# EAGLE board 3K_valdiklis_v1.2x (EAGLE 6.4)
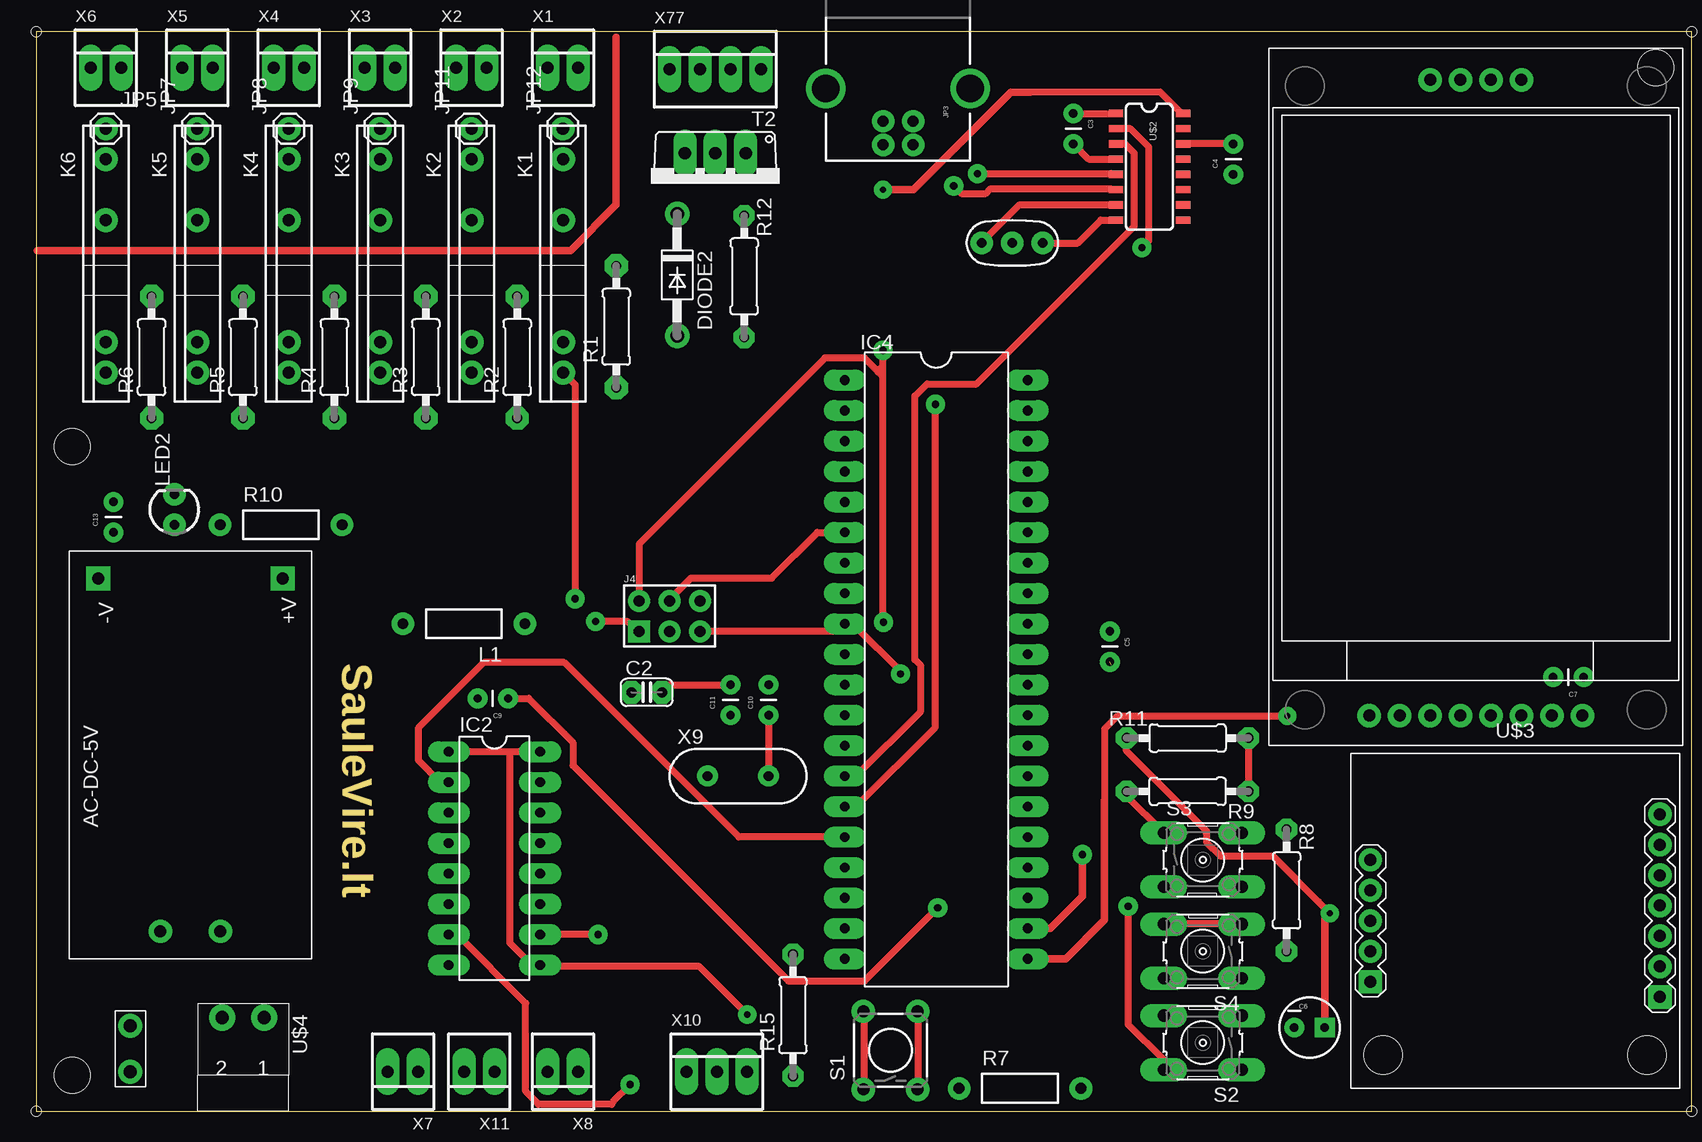
[diagram p0: board, top side]
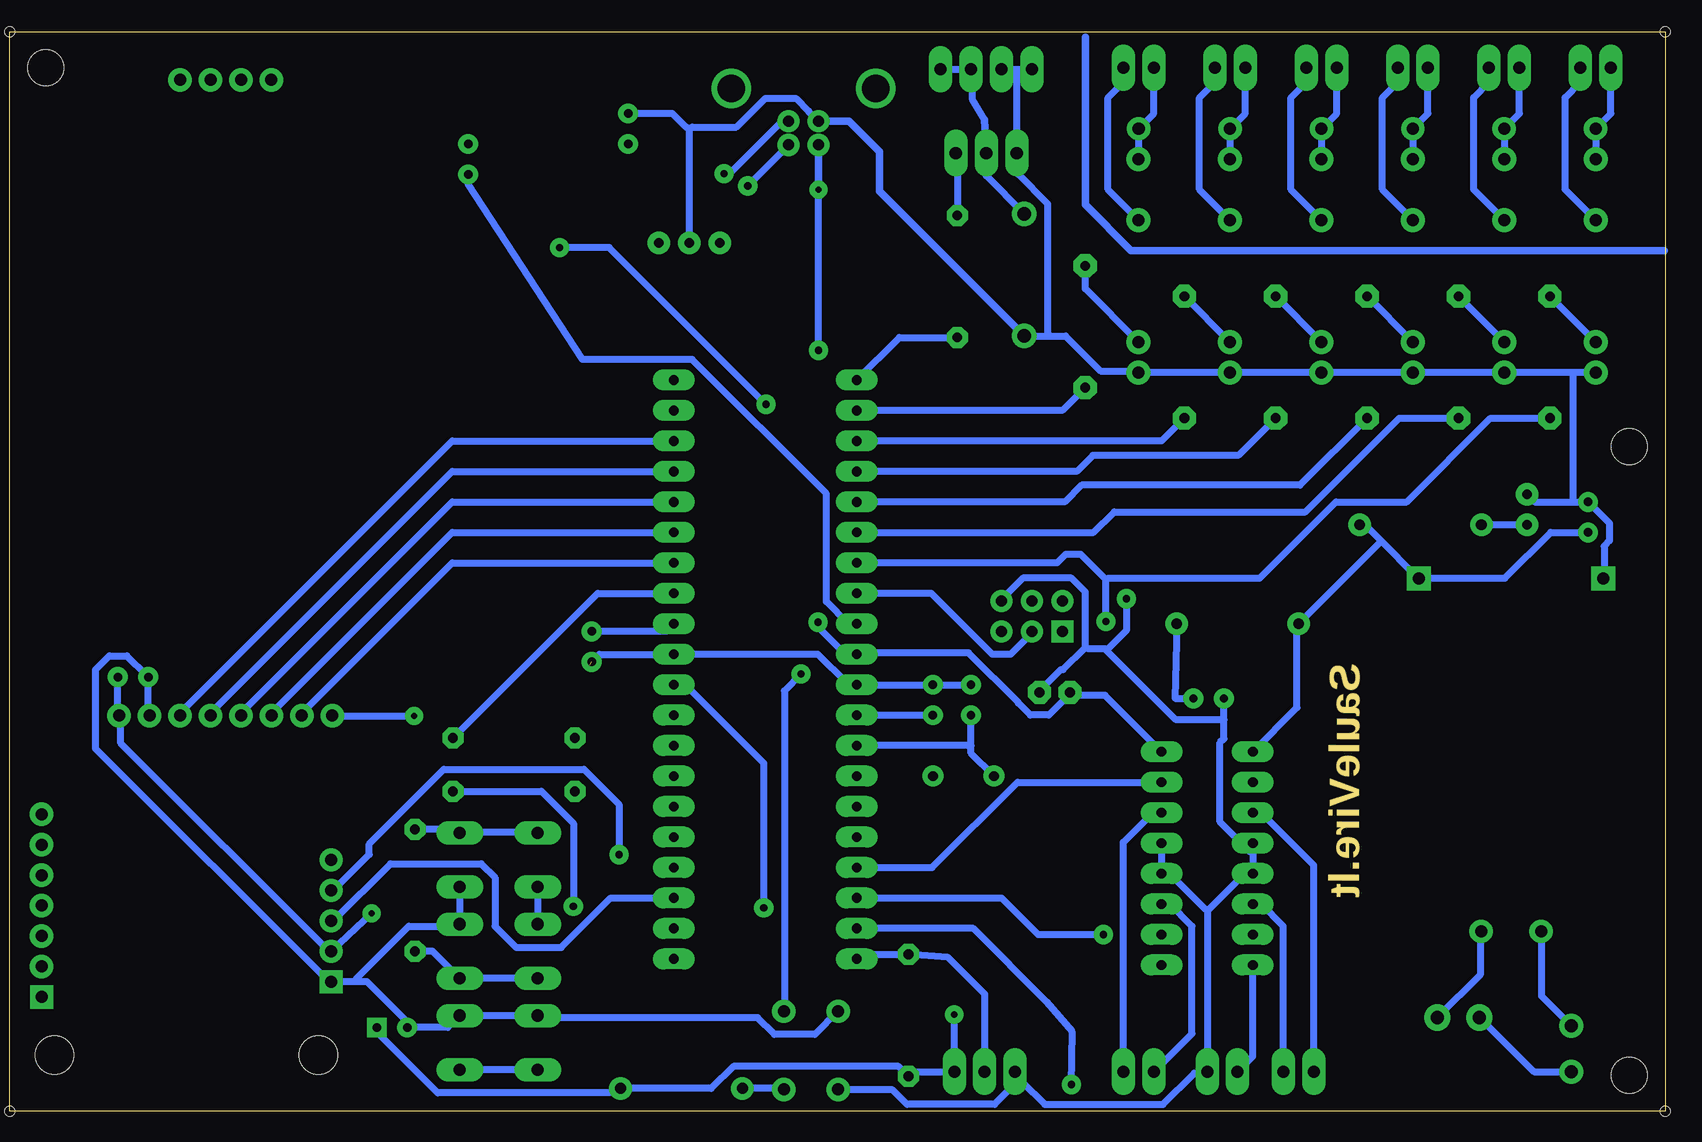
[diagram p1: board, bottom side, seen from below]

No outline drawn. Coordinates in mm, seen from the top.
Copper layers (1*16): Top 0.035mm / dielectric 1.5mm / Bottom 0.035mm
Design rules "3K_valdiklis_v1 *": minimum track width 0.6mm, minimum drill 0.6mm, track to track 0.6mm, track to pad 0.6mm, pad to pad 0.6mm, via to via 0.6mm, smd to smd 0.6mm, copper to edge 0.6mm, drill to drill 0.6mm, minimum pad ring 0.47mm, minimum via ring 0.5mm, stop-mask expansion 0.6mm, vias tented up to drill 0.6mm, thermal gap 0.6mm
Net classes: 1 vcc: width 0.5 mm; 4 gnd: width 0.5 mm; 5 220v: width 0.5 mm
Holes 3 mm at 8,55.42 140,87 8,3
Holes 0.8 mm at 5,0 5,90 143,90 143,0
Milling: 4 lines

## Footprints (pad centres in the part's own frame; a part is rotated, then mirrored left to right if it is on the bottom)
HLK-PM01_AC_DC = drill 1 pad 2 square: +V 31.7,2.4; -V 31.7,17.8 | drill 1: AC0 2.3,12.6; AC1 2.3,7.6
C025-024X044 = drill 0.813 pad 1.93 octagon: 1 -1.27,0; 2 1.27,0
CAP-PTH-SMALL = drill 0.7 pad 1.651: 1 0,0; 2 2.54,0
CPOL-RADIAL-10UF-25V = drill 0.7 pad 1.651 square: 1 1.27,0 | drill 0.7 pad 1.651: 2 -1.27,0
DO41-10 = drill 1.118: A 5.08,0; C -5.08,0
DIL16 = drill 0.813 long: 1 -8.89,-3.81; 2 -6.35,-3.81; 3 -3.81,-3.81; 4 -1.27,-3.81; 5 1.27,-3.81; 6 3.81,-3.81; 7 6.35,-3.81; 8 8.89,-3.81; 9 8.89,3.81; 10 6.35,3.81; 11 3.81,3.81; 12 1.27,3.81; 13 -1.27,3.81; 14 -3.81,3.81; 15 -6.35,3.81; 16 -8.89,3.81
DIL40 = drill 0.813 long: 1 -24.13,-7.62; 2 -21.59,-7.62; 3 -19.05,-7.62; 4 -16.51,-7.62; 5 -13.97,-7.62; 6 -11.43,-7.62; 7 -8.89,-7.62; 8 -6.35,-7.62; 9 -3.81,-7.62; 10 -1.27,-7.62; 11 1.27,-7.62; 12 3.81,-7.62; 13 6.35,-7.62; 14 8.89,-7.62; 15 11.43,-7.62; 16 13.97,-7.62; 17 16.51,-7.62; 18 19.05,-7.62; 19 21.59,-7.62; 20 24.13,-7.62; 21 24.13,7.62; 22 21.59,7.62; 23 19.05,7.62; 24 16.51,7.62; 25 13.97,7.62; 26 11.43,7.62; 27 8.89,7.62; 28 6.35,7.62; 29 3.81,7.62; 30 1.27,7.62; 31 -1.27,7.62; 32 -3.81,7.62; 33 -6.35,7.62; 34 -8.89,7.62; 35 -11.43,7.62; 36 -13.97,7.62; 37 -16.51,7.62; 38 -19.05,7.62; 39 -21.59,7.62; 40 -24.13,7.62
HEAD3X2 = drill 0.914 pad 1.778 square: 1 0,0 | drill 0.914 pad 1.778: 2 0,2.54; 3 2.54,0; 4 2.54,2.54; 5 5.08,0; 6 5.08,2.54
1X02_BIG = drill 1.067 pad 1.93: P$1 0,0; P$2 3.81,0
USB-B-PTH = drill 0.914 pad 1.676: D+ 0,1.25; D- 1.981,1.25; GND 0,-1.25; VBUS 1.981,-1.25 | drill 2.286: S1 -2.718,-6.02; S2 -2.718,6.02
1X01 = drill 1.016 pad 1.88: 1 0,0
S202T02 = drill 1 pad 2: A 10.16,0; DS1 -5.08,0; DS2 0,0; K 12.7,0
RES-AXIAL-0.4 = drill 0.9 pad 1.88: P$1 -5.08,0; P$2 5.08,0
LED3MM = drill 0.813 pad 1.88: A -1.27,0; K 1.27,0
0207/10 = drill 0.813 pad 1.93 octagon: 1 -5.08,0; 2 5.08,0
0207/10' = drill 0.813 octagon: 1 -5.08,0; 2 5.08,0
0207/10'' = drill 0.813 pad 1.676 octagon: 1 -5.08,0; 2 5.08,0
TACTILE-PTH = drill 1.016 pad 1.88: 1 -3.251,2.261; 2 3.251,2.261; 3 -3.251,-2.261; 4 3.251,-2.261
B3F-10XX = drill 1.016 long: 1 -3.251,2.261; 2 3.251,2.261; 3 -3.251,-2.261; 4 3.251,-2.261
TO220AV = drill 1.016 long: B -2.54,-2.54; C 0,-2.54; E 2.54,-2.54
1.8"_TFT = drill 1 pad 1.778: P$3 55.5,21.05; P$4 55.5,18.52; P$5 55.5,15.98; P$6 55.5,13.44; P$9 2.5,26.14; P$10 2.5,23.6; P$11 2.5,21.06; P$12 2.5,18.52; P$13 2.5,15.98; P$14 2.5,13.44; P$15 2.5,10.9; P$16 2.5,8.36
SO016 = smd 0.6 x 1.2: 1 -4.445,-2.8; 2 -3.175,-2.8; 3 -1.905,-2.8; 4 -0.635,-2.8; 5 0.635,-2.8; 6 1.905,-2.8; 7 3.175,-2.8; 8 4.445,-2.8; 9 4.445,2.8; 10 3.175,2.8; 11 1.905,2.8; 12 0.635,2.8; 13 -0.635,2.8; 14 -1.905,2.8; 15 -3.175,2.8; 16 -4.445,2.8
RTC_EEPROM_BATTERY = drill 1 square: J1.1 -12.065,-5.08; J2.1 12.065,-6.35 | drill 1: J1.2 -12.065,-2.54; J1.3 -12.065,0; J1.4 -12.065,2.54; J1.5 -12.065,5.08; J2.2 12.065,-3.81; J2.3 12.065,-1.27; J2.4 12.065,1.27; J2.5 12.065,3.81; J2.6 12.065,6.35; J2.7 12.065,8.89 | hole 3.2: -11,-11.176; 11,-11.176
2-3.50 = drill 1.1 pad 2.184: 1 2.05,1.2; 2 5.55,1.2
22-23-2021 = drill 1 long: 1 -1.27,0; 2 1.27,0
HC49US = drill 0.813: 1 -2.54,0; 2 2.54,0
22-23-2031 = drill 1 long: 1 -2.54,0; 2 0,0; 3 2.54,0
22-23-2041 = drill 1 long: 1 -3.81,0; 2 -1.27,0; 3 1.27,0; 4 3.81,0
RESONATOR-PTH = drill 0.8 pad 1.88: 1 -2.54,0; 2 0,0; 3 2.54,0

## Placement (x,y rotation side)
AC-DC-5V  HLK-PM01_AC_DC  [HLK-PM01_AC_DC]  27.94,12.7 90 top
C2  [C025-024X044]  55.88,34.92 0 top
C3  100n  [CAP-PTH-SMALL]  91.44,83.19 270 top
C4  100n  [CAP-PTH-SMALL]  104.78,78.11 90 top
C5  100n  [CAP-PTH-SMALL]  94.49,40.01 270 top
C6  4u7  [CPOL-RADIAL-10UF-25V]  111.12,6.99 0 top
C7  100n  [CAP-PTH-SMALL]  133.99,36.2 180 top
C9  100n  [CAP-PTH-SMALL]  44.32,34.42 180 top
C10  22p  [CAP-PTH-SMALL]  66.04,33.02 90 top
C11  22p  [CAP-PTH-SMALL]  62.87,33.02 90 top
C13  100n  [CAP-PTH-SMALL]  11.43,48.26 90 top
DIODE2  1N4004  [DO41-10]  58.42,69.72 270 top
IC2  L293D  [DIL16]  43.18,21.08 270 top
IC4  ATMEGA1284  [DIL40]  80.01,36.83 270 top
J4  HEAD3X2  [HEAD3X2]  55.24,40.01 0 top
JP2  M02PTH2  [1X02_BIG]  12.83,7.11 270 top
JP3  USB-B  [USB-B-PTH]  76.83,82.55 270 top
JP5  M01PTH  [1X01]  10.79,81.92 0 top
JP7  M01PTH  [1X01]  18.41,81.92 90 top
JP8  M01PTH  [1X01]  26.04,81.92 90 top
JP9  M01PTH  [1X01]  33.66,81.92 90 top
JP11  M01PTH  [1X01]  41.27,81.92 90 top
JP12  M01PTH  [1X01]  48.9,81.92 90 top
K1  S202T02  [S202T02]  48.9,74.3 270 top
K2  S202T02  [S202T02]  41.27,74.3 270 top
K3  S202T02  [S202T02]  33.66,74.3 270 top
K4  S202T02  [S202T02]  26.04,74.3 270 top
K5  S202T02  [S202T02]  18.41,74.3 270 top
K6  S202T02  [S202T02]  10.79,74.3 270 top
L1  10uH  [RES-AXIAL-0.4]  40.64,40.64 180 top
LED2  PWR  [LED3MM]  16.51,50.16 90 top
R1  330  [0207/10]  53.34,65.41 90 top
R2  330  [0207/10]  45.09,62.87 90 top
R3  330  [0207/10]  37.47,62.87 90 top
R4  330  [0207/10]  29.84,62.87 90 top
R5  330  [0207/10]  22.23,62.87 90 top
R6  330  [0207/10]  14.61,62.87 90 top
R7  10k  [RES-AXIAL-0.4]  87,1.91 0 top
R8  3k3  [0207/10']  109.22,18.41 90 top
R9  1k  [0207/10']  100.97,26.67 0 top
R10  1k  [RES-AXIAL-0.4]  25.4,48.9 0 top
R11  2k  [0207/10']  100.97,31.11 180 top
R12  2k  [0207/10']  64.01,69.6 90 top
R15  4.7K  [0207/10'']  68.07,8 90 top
S1  RESET  [TACTILE-PTH]  76.2,5.08 90 top
S2  [B3F-10XX]  102.23,5.71 180 top
S3  [B3F-10XX]  102.23,20.95 0 top
S4  [B3F-10XX]  102.23,13.34 180 top
T2  TIP120V  [TO220AV]  61.59,77.34 180 top
U$1  1.8"_TFT  [1.8"_TFT]  142.24,30.48 90 top
U$2  CH340G  [SO016]  97.79,78.74 270 top
U$3  RTC-EEPROM-BATTERY  [RTC_EEPROM_BATTERY]  128.27,15.88 0 top
U$4  2-3.50  [2-3.50]  26.04,9.02 180 top
X1  Boiler pump  [22-23-2021]  48.9,87 0 top
X2  Storage tank pump  [22-23-2021]  41.27,87 0 top
X3  Radiator pump  [22-23-2021]  33.66,87 0 top
X4  4 way valve 1  [22-23-2021]  26.04,87 0 top
X5  4 way valve 2  [22-23-2021]  18.41,87 0 top
X6  Floor heating  [22-23-2021]  10.79,87 0 top
X7  motorized valve 1  [22-23-2021]  35.56,3.3 180 top
X8  motorized valve 2  [22-23-2021]  48.9,3.3 180 top
X9  16MHz  [HC49US]  63.5,27.94 0 top
X10  22-23-2031  [22-23-2031]  61.72,3.3 0 top
X11  +12V  [22-23-2021]  41.91,3.3 180 top
X77  PUMP1  [22-23-2041]  61.59,86.87 0 top
Y1  12mhz  [RESONATOR-PTH]  86.36,72.39 0 top

## Library data of the parts
AC-DC-5V = HLK-PM01
C2 = rcl-1
C3-C7 C9 C13 LED2 S1 X9 = SparkFun
C10 C11 = SparkFun; OPTION: Do not fit for ceramic resonator
DIODE2 = diode
IC2 = st-microelectronics; MPN: L293D; OC_FARNELL: 9589619; OC_NEWARK: 56P8249
IC4 = SteveMarple; MPN: ATMEGA644-20PU; OC_FARNELL: 1288340; OC_NEWARK: 23M5060
J4 = MyCON2
JP2 JP5 JP7-JP9 JP11 JP12 = SparkFun-Connectors-1
JP3 = SparkFun-Connectors-1; PROD_ID: CONN-08278
K1-K6 = relay-1
L1 R7 R10 = SteveMarple
R1-R6 = resistor-1
R8 R9 R11 R12 = resistor
R15 = adafruit
S2-S4 = switch-omron; MPN: B3F-1000; OC_FARNELL: 176432; OC_NEWARK: 36M3542
T2 = rocketfarm
U$1 = tft_1.8_1.44_oled_0.96
U$2 = ch340
U$3 = diy-modules-1
U$4 = con-phoenix-350-1
X1-X8 X11 = con-molex; MF: MOLEX; MPN: 22-23-2021; OC_FARNELL: 1462926; OC_NEWARK: 25C3832
X10 = con-molex; MF: MOLEX; MPN: 22-23-2031; OC_FARNELL: 1462950; OC_NEWARK: 30C0862
X77 = con-molex; MF: MOLEX; MPN: 22-23-2041; OC_FARNELL: 1462920; OC_NEWARK: 38C0355
Y1 = SparkFun-FreqCtrl

## Nets
220V [220v]: AC-DC-5V.AC1 U$4.1
!RESET: C4.1 IC4.9 J4.5 R7.P$1 S1.3 S1.4
+12V: DIODE2.C T2.C X77.3 X77.4
A0: IC4.40
A1: IC4.39
A2: IC4.38 U$1.P$14
A3: IC4.37 U$1.P$13
A4: IC4.36 U$1.P$12
A5: IC4.35 U$1.P$11
A6: IC4.34 U$1.P$10
A7: IC4.33 R9.2 R11.1 S2.1 S2.2
AREF: C5.1 IC4.32
AVCC [vcc]: C9.1 IC4.30 L1.P$1
D0: IC4.1 R12.1
D1: IC4.2 R1.1
D2: IC4.3 R2.1
D3: IC4.4 R3.1
D4: IC4.5 R4.1
D5(MOSI): IC4.6 J4.4 R5.1
D6(MISO): IC4.7 J4.1 R6.1
D7(SCK): IC4.8 J4.3
D8(RX0): IC4.14 U$2.3
D9(TX0): IC4.15 U$2.2
D10(RX1): IC2.2 IC4.16
D11(TX1): IC2.15 IC4.17
D12: IC2.10 IC4.18
D13: IC2.7 IC4.19
D14: IC4.20 R15.2 X10.2
D15: IC4.21 U$1.P$9
D16(SCL): IC4.22 U$3.J1.4
D17(SDA): IC4.23 U$3.J1.3
D18(TCK): IC4.24
D19(TMS): IC4.25
D20(TDO): IC4.26
D21: IC4.27
D22: IC4.28
D23: IC4.29
GND [vcc]: AC-DC-5V.-V C2.2 C3.1 C5.2 C6.2 C7.2 C9.2 C10.2 C11.2 C13.2 DIODE2.A IC2.4 IC2.5 IC2.12 IC2.13 IC4.11 IC4.31 J4.6 JP3.GND K1.K K2.K K3.K K4.K K5.K K6.K LED2.K S1.1 S1.2 S2.3 S2.4 S3.3 S3.4 S4.3 S4.4 T2.E U$1.P$15 U$2.1 U$3.J1.1 X10.1 X11.1 X77.1 X77.2 Y1.2
GND.2: U$3.J2.2
MV1.1: IC2.3 X7.2
MV1.2: IC2.6 X7.1
MV2.1: IC2.14 X8.1
MV2.2: IC2.11 X8.2
N$1: C11.1 IC4.13 X9.1
N$2: C10.1 IC4.12 X9.2
N$3 [220v]: AC-DC-5V.AC0 JP2.P$1
N$4 [220v]: JP2.P$2 U$4.2
N$6: R8.1 S4.1 S4.2
N$7: U$2.7 Y1.1
N$8: LED2.A R10.P$1
N$9: U$2.8 Y1.3
N$10: R8.2 R9.1 S3.1 S3.2
N$11: C4.2 U$2.14
N$12: JP3.D- U$2.6
N$13: R12.2 T2.B
N$14: C3.2 U$2.4
N$16: K3.A R3.2
N$18 [220v]: JP9.1 K3.DS1 X3.1
N$19: IC2.8 X11.2
N$22: JP3.D+ U$2.5
N$23 [220v]: K3.DS2 X3.2
N$24: K2.A R2.2
N$25 [220v]: JP11.1 K2.DS1 X2.1
N$26 [220v]: K2.DS2 X2.2
N$28: K4.A R4.2
N$29 [220v]: JP8.1 K4.DS1 X4.1
N$30 [220v]: K4.DS2 X4.2
N$31: K1.A R1.2
N$32 [220v]: JP12.1 K1.DS1 X1.1
N$33 [220v]: K1.DS2 X1.2
N$34: K6.A R6.2
N$35 [220v]: JP5.1 K6.DS1 X6.1
N$36 [220v]: K6.DS2 X6.2
N$37: K5.A R5.2
N$38 [220v]: JP7.1 K5.DS1 X5.1
N$39 [220v]: K5.DS2 X5.2
N$40: U$3.J1.5
VCC [vcc]: AC-DC-5V.+V C2.1 C6.1 C7.1 C13.1 IC2.1 IC2.9 IC2.16 IC4.10 J4.2 JP3.VBUS L1.P$2 R7.P$2 R10.P$2 R11.2 R15.1 U$1.P$16 U$2.16 U$3.J1.2 X10.3
VCC.2: U$3.J2.3

## Tracks (layer width: path | path; a pad name or v marks a point on that pad's centre or on a via)
220V
  Bottom 0.6: AC-DC-5V.AC1 20.38,14.99 20.38,11.43 23.94,7.87 U$4.1
!RESET  (via drill 0.6)
  Top 0.6: v77.03,36.45 77.03,36.7 73.22,40.51 72.64,40.51 IC4.9 72.14,40.51 71.63,40.01 J4.5 | S1.3 78.49,1.84 78.49,8.32 S1.4
  Bottom 0.6: R7.P$1 78.55,1.91 78.49,1.84 S1.3 | C4.1 104.78,77.28 95.25,62.67 86.11,62.67 74.93,51.5 74.93,42.48 73.09,40.64 IC4.9 | v77.03,36.45 78.42,35.05 78.42,8.38 S1.4
+12V
  Bottom 0.6: X77.4 X77.3 62.74,86.61 62.74,84.33 61.72,82.68 | T2.C 61.59,77.98 DIODE2.C
  Bottom 0.61: 61.72,82.68 T2.C
A2
  Bottom 0.6: IC4.38 106.11,55.88 128.78,33.21 128.78,33.02 U$1.P$14
A3
  Bottom 0.6: IC4.37 106.11,53.34 126.24,33.21 126.24,33.02 U$1.P$13
A4
  Bottom 0.6: IC4.36 106.11,50.8 123.7,33.21 123.7,33.02 U$1.P$12
A5
  Bottom 0.6: IC4.35 106.11,48.26 121.16,33.21 121.16,33.02 U$1.P$11
A6
  Bottom 0.6: IC4.34 106.11,45.72 118.62,33.21 118.62,33.02 U$1.P$10
A7  (via drill 0.6)
  Top 0.6: R11.1 R9.2 | v96.01,17.08 96.01,7.24 98.93,4.32 98.93,3.49 S2.2
  Bottom 0.6: S2.2 99,3.49 105.47,3.49 S2.1 | IC4.33 93.98,43.18 R11.1 | v96.01,17.08 96.01,24 98.68,26.67 R9.2
AREF
  Bottom 0.6: C5.1 88.27,40.01 IC4.32
AVCC  (via drill 0.6)
  Top 0.6: v80.14,16.95 74.04,10.86 67.69,10.86 49.72,28.83 49.72,30.73 46.04,34.42 C9.1
  Bottom 0.6: C9.1 45.85,34.42 L1.P$1 | IC4.30 86.68,35.56 80.14,29.02 v80.14,16.95
D0
  Bottom 0.6: R12.1 68.83,64.52 IC4.1
D1
  Bottom 0.6: IC4.2 55.24,58.42 R1.1
D2
  Bottom 0.6: IC4.3 46.99,55.88 R2.1
D3
  Bottom 0.6: IC4.4 54.04,53.34 52.7,54.67 40.58,54.67 R3.1
D4
  Bottom 0.6: IC4.5 55.05,50.8 53.66,52.2 35.43,52.2 R4.1
D5(MOSI)
  Top 0.6: IC4.6 70.1,48.26 66.29,44.45 59.56,44.45 57.78,42.67 J4.4
  Bottom 0.6: R5.1 27.18,57.78 34.99,49.97 50.93,49.97 52.64,48.26 IC4.6
D6(MISO)  (via drill 0.6)
  Top 0.6: v51.63,40.83 54.29,40.83 55.12,40.01 J4.1
  Bottom 0.6: IC4.7 55.69,45.72 54.99,46.42 53.72,46.42 51.63,44.32 | v51.63,40.83 51.63,44.32 | R6.1 19.56,57.78 26.54,50.8 32.45,50.8 38.8,44.45 51.37,44.45 51.63,44.32
D7(SCK)
  Bottom 0.6: IC4.8 66.17,43.18 61.09,38.1 59.56,38.1 57.78,39.88 J4.3
D8(RX0)
  Top 0.6: IC4.14 73.34,27.94 78.74,33.34 78.74,37.15 78.23,37.66 78.23,59.63 79.25,60.64 83.38,60.64 96.52,73.79 96.52,79.88 95.76,80.64 U$2.3
D9(TX0)  (via drill 0.6)
  Top 0.6: v97.16,72.01 97.73,72.58 97.73,80.39 96.2,81.92 U$2.2 | v79.95,58.93 79.95,32 73.34,25.4 IC4.15
  Bottom 0.6: v97.16,72.01 93.03,72.01 v79.95,58.93
D10(RX1)
  Top 0.6: IC2.2 38.67,27.43 36.83,29.27 36.83,31.94 42.29,37.4 49.02,37.4 63.56,22.86 IC4.16
D11(TX1)
  Bottom 0.6: IC2.15 58.99,27.43 66.1,20.32 IC4.17
D12  (via drill 0.6)
  Top 0.6: v51.82,14.73 IC2.10
  Bottom 0.6: v51.82,14.73 57.28,14.73 60.33,17.78 IC4.18
D13  (via drill 0.6)
  Top 0.6: IC2.7 40.07,14.73 45.78,9.02 45.78,1.65 46.86,0.57 52.96,0.57 53.09,0.83 v54.48,2.22
  Bottom 0.6: IC4.19 62.67,15.24 56.58,9.14 54.42,6.6 v54.48,2.22
D14
  Bottom 0.6: IC4.20 72.01,13.08 R15.2 64.77,12.83 61.72,9.78 X10.2
D15  (via drill 0.51)
  Top 0.6: 94.04,25.91 94.04,31.88 95.12,32.96 95.38,32.96 v109.28,32.96
  Top 0.61: 94.04,25.91 94.04,15.94 90.81,12.7 IC4.21
  Bottom 0.6: v109.28,32.96 116.08,32.96 U$1.P$9
D16(SCL)  (via drill 0.6)
  Top 0.61: v92.2,21.4 92.2,17.91 89.53,15.24 IC4.22
  Bottom 0.6: v92.2,21.4 92.2,25.59 95.12,28.51 106.81,28.51 113.03,22.29 113.03,21.4 116.01,18.41 U$3.J1.4
D17(SDA)
  Bottom 0.6: IC4.23 92.9,17.78 97.03,13.65 100.78,13.65 102.55,15.43 102.55,19.49 103.69,20.64 111.25,20.64 116.01,15.88 U$3.J1.3
GND  (via drill 0.6)  (1 unrouted)
  Top 0.6: C3.1 94.93,83.19 U$2.1 | S1.1 73.98,1.84 73.98,8.32 S1.2 | S4.4 99,15.62 105.47,15.62 S4.3 | C11.2 57.78,35.56 C2.2 | v49.91,42.74 49.91,60.58 K1.K
  Bottom 0.6: 86.36,81.92 Y1.2 | JP3.GND 75.63,82.55 76.39,83.31 76.39,83.38 77.47,84.45 80.01,84.45 82.42,82.04 86.11,82.04 86.36,81.92 | C3.1 87.76,83.19 86.61,82.04 86.36,81.92 | IC2.13 IC2.12 46.74,19.68 46.16,19.68 43.37,16.89 43.18,16.7 | C11.2 C10.2 66.29,35.56 IC4.11 72.64,35.69 73.22,35.69 75.63,38.1 87.38,38.1 IC4.31 93.85,38.1 C5.2 | X77.2 59.05,86.87 | 59.05,86.87 X77.1 | 59.05,86.87 59.05,86.61 59.05,80.14 T2.E 58.93,79.63 58.93,78.11 56.45,75.63 56.45,64.9 56.45,64.64 | S1.1 73.91,1.78 69.41,1.78 68.2,0.57 60.9,0.57 58.86,2.6 X10.1 58.61,2.48 56.71,0.57 46.86,0.57 44.26,3.17 43.43,3.17 X11.1 43.18,16.7 | K6.K 12.7,61.59 | 12.7,61.59 18.16,61.59 K5.K 18.67,61.59 K4.K 26.29,61.59 K3.K 33.91,61.59 41.02,61.59 K2.K 48.64,61.59 K1.K 49.15,61.72 52.07,61.72 54.99,64.64 56.45,64.64 | 43.18,16.7 39.62,20.26 IC2.5 39.37,22.1 IC2.4 39.62,21.65 42.1,24.13 42.1,30.73 41.78,31.05 41.78,32.64 | S4.4 99,15.62 99,18.67 S3.3 | S3.4 105.47,18.67 105.47,15.62 S4.3 105.73,15.43 109.73,15.43 114.11,11.05 114.11,10.79 | U$1.P$15 131.38,33.02 131.44,33.08 C7.2 131.64,36.39 133.22,37.97 134.68,37.97 135.83,36.83 135.83,30.23 116.46,10.86 U$3.J1.1 114.11,10.79 | 114.11,10.79 113.22,10.79 109.67,7.24 C6.2 106.49,6.99 105.54,7.94 S2.3 105.22,8 99,8 S2.4 98.74,7.81 80.64,7.81 79.25,6.41 75.88,6.41 73.98,8.32 S1.2 | 12.7,50.8 15.88,50.8 LED2.K | 12.7,50.8 C13.2 11.24,50.61 9.65,49.02 9.65,47.56 10.1,47.12 10.1,44.45 AC-DC-5V.-V | 12.7,50.8 12.7,51.05 12.7,61.34 12.7,61.59 | DIODE2.A 56.45,64.64 | 41.78,32.64 C9.2 | J4.6 60.33,42.67 58.55,44.45 54.48,44.45 53.34,43.31 53.34,38.67
  Bottom 0.6: 53.34,38.67 55.18,36.83 55.37,36.83 57.15,35.05 C2.2 | 51.56,38.42 45.78,32.64 42.04,32.64 41.78,32.64 | 51.56,38.42 51.69,38.54 53.09,38.54 53.34,38.67 | v49.91,42.74 49.91,40.07 51.37,38.61 51.56,38.42
  Bottom 0.61: JP3.GND 73.03,82.55 70.48,80.01 70.48,76.71 DIODE2.A
MV1.1
  Bottom 0.6: IC2.3 38.67,24.89 34.29,20.51 X7.2
MV1.2
  Bottom 0.6: IC2.6 38.67,17.27 36.83,15.43 X7.1
MV2.1
  Bottom 0.6: IC2.14 47.69,24.89 50.16,22.42 X8.1
MV2.2
  Bottom 0.6: IC2.11 46.29,17.27 44.45,15.43 44.45,6.48 X8.2
N$1
  Bottom 0.6: 62.87,30.48 62.87,29.84 X9.1 | 62.87,30.48 C11.1 | IC4.13 63.12,30.48 62.87,30.48
N$2
  Top 0.6: C10.1 X9.2
  Bottom 0.6: IC4.12 C10.1
N$3
  Bottom 0.6: JP2.P$1 15.3,9.59 15.3,14.99 AC-DC-5V.AC0
N$4
  Bottom 0.6: JP2.P$2 15.94,3.3 20.45,7.81 U$4.2
N$5
  Top 0.61: 5.08,71.75 49.53,71.75 53.34,75.56 53.34,89.53
N$6
  Bottom 0.6: R8.1 107.76,13.34 105.54,11.11 S4.1 105.22,11.11 99,11.11 S4.2
N$7
  Top 0.6: Y1.1 83.82,72.45 86.93,75.56 94.93,75.56 U$2.7
N$8
  Bottom 0.6: R10.P$1 LED2.A
N$9
  Top 0.6: Y1.3 91.82,72.39 93.73,74.3 94.93,74.3 U$2.8
N$10
  Top 0.6: R9.1 95.89,26.29 98.93,23.24 S3.1
  Bottom 0.6: R8.2 105.79,23.5 105.54,23.24 S3.2 105.22,23.24 99,23.24 S3.1
N$11
  Top 0.6: C4.2 100.65,80.64 U$2.14
N$12  (via drill 0.6)
  Top 0.6: v81.47,77.15 82.11,76.52 84.14,76.52 84.52,76.9 94.61,76.9 94.68,76.83 94.93,76.83 U$2.6
  Bottom 0.6: v81.47,77.15 78.11,80.52 JP3.D-
N$13
  Bottom 0.6: R12.2 64.01,79.76 T2.B
N$14
  Top 0.6: C3.2 92.71,79.38 94.93,79.38 U$2.4
N$16
  Bottom 0.6: K3.A R3.2
N$17
  Bottom 0.61: 5.08,71.75 49.53,71.75 53.34,75.56 53.34,89.53
N$18
  Bottom 0.6: X3.1 32.38,83.19 JP9.1 33.66,81.66 K3.DS1
N$19
  Bottom 0.6: IC2.8 39.37,4.57 X11.2
N$22  (via drill 0.6)
  Top 0.6: v83.44,78.17 94.61,78.17 94.68,78.11 94.93,78.11 U$2.5
  Bottom 0.6: v83.44,78.17 83,78.17 78.61,82.55 78.11,82.55 JP3.D+
N$23
  Bottom 0.6: X3.2 34.92,85.79 36.2,84.52 36.2,76.83 K3.DS2
N$24
  Bottom 0.6: K2.A R2.2
N$25
  Bottom 0.6: X2.1 40.01,83.19 JP11.1 41.27,81.66 K2.DS1
N$26
  Bottom 0.6: X2.2 42.55,85.79 43.81,84.52 43.81,76.83 K2.DS2
N$28
  Bottom 0.6: K4.A R4.2
N$29
  Bottom 0.6: X4.1 24.77,83.19 JP8.1 26.04,81.66 K4.DS1
N$30
  Bottom 0.6: X4.2 27.3,85.79 28.57,84.52 28.57,76.83 K4.DS2
N$31
  Bottom 0.6: R1.2 53.34,68.58 K1.A
N$32
  Bottom 0.6: X1.1 47.62,83.19 JP12.1 48.9,81.66 K1.DS1
N$33
  Bottom 0.6: X1.2 50.16,85.79 51.44,84.52 51.44,76.83 K1.DS2
N$34
  Bottom 0.6: K6.A R6.2
N$35
  Bottom 0.6: X6.1 9.53,83.19 JP5.1 10.79,81.66 K6.DS1
N$36
  Bottom 0.6: X6.2 12.06,85.79 13.34,84.52 13.34,76.83 K6.DS2
N$37
  Bottom 0.6: R5.2 21.59,67.31 K5.A
N$38
  Bottom 0.6: X5.1 17.14,83.19 JP7.1 18.41,81.66 K5.DS1
N$39
  Bottom 0.6: X5.2 19.68,85.79 20.95,84.52 20.95,76.83 K5.DS2
VCC  (via drill 0.51, 0.6)
  Top 0.6: IC2.16 44.45,29.97 | 44.45,29.97 IC2.1 | 87.88,84.96 98.68,84.96 100.33,83.31 U$2.16 | 44.45,29.97 44.45,29.72 44.45,14.03 46.29,12.19 IC2.9 47.24,12.06 60.26,12.06 v64.26,8.06 | R11.2 95.89,30.04 102.55,23.37 102.55,23.11 102.55,22.42 103.69,21.27 108.08,21.27 111.89,17.46 v112.84,16.51 | 75.56,61.91 75.56,40.83 v75.63,40.77 | 75.56,61.91 v75.56,63.44 | J4.2 55.24,47.31 70.74,62.8 74.04,62.8 75.12,61.72 | 75.44,61.4 75.12,61.72 | 75.12,61.72 75.31,61.91 75.56,61.91
  Top 0.61: C6.1 112.39,13.34 112.39,16.07 v112.84,16.51 | 87.88,84.96 86.23,84.96 78.11,76.83 v75.56,76.83
  Bottom 0.6: 72.26,38.29 IC4.10 | v64.26,8.06 X10.3 68.07,3.3 R15.1 68.9,3.75 82.68,3.75 84.52,1.91 R7.P$2 92.33,1.78 92.58,1.52 107.31,1.52 112.39,6.6 C6.1 | U$3.J1.2 116.46,13.4 133.73,30.67 133.73,32.7 U$1.P$16 133.99,33.21 C7.1 | U$3.J1.2 v112.84,16.51 U$3.J1.2 | C13.1 14.54,48.26 18.35,44.45 25.53,44.45 AC-DC-5V.+V 25.78,44.64 28.67,47.53 | R10.P$2 30.04,48.9 28.67,47.53 | IC4.10 71.94,38.23 63.06,38.23 58.93,34.1 58.93,34.04 57.91,33.02 56.39,33.02 54.61,34.8 C2.1 54.36,34.67 51.69,34.67 IC2.16 | v75.56,63.44 v75.56,76.83 75.56,80.01 75.56,80.52 JP3.VBUS | v75.63,40.77 75.63,40.39 73.41,38.16 72.71,38.16 IC4.10 | 28.67,47.53 28.83,47.37 L1.P$2 35.69,40.39 35.69,33.66 IC2.1
  Bottom 0.61: v75.56,76.83 75.56,80.01

## Text on the board
Milling: SauleVire.lt